# EAGLE board esp_all2 (EAGLE 7.7.0)
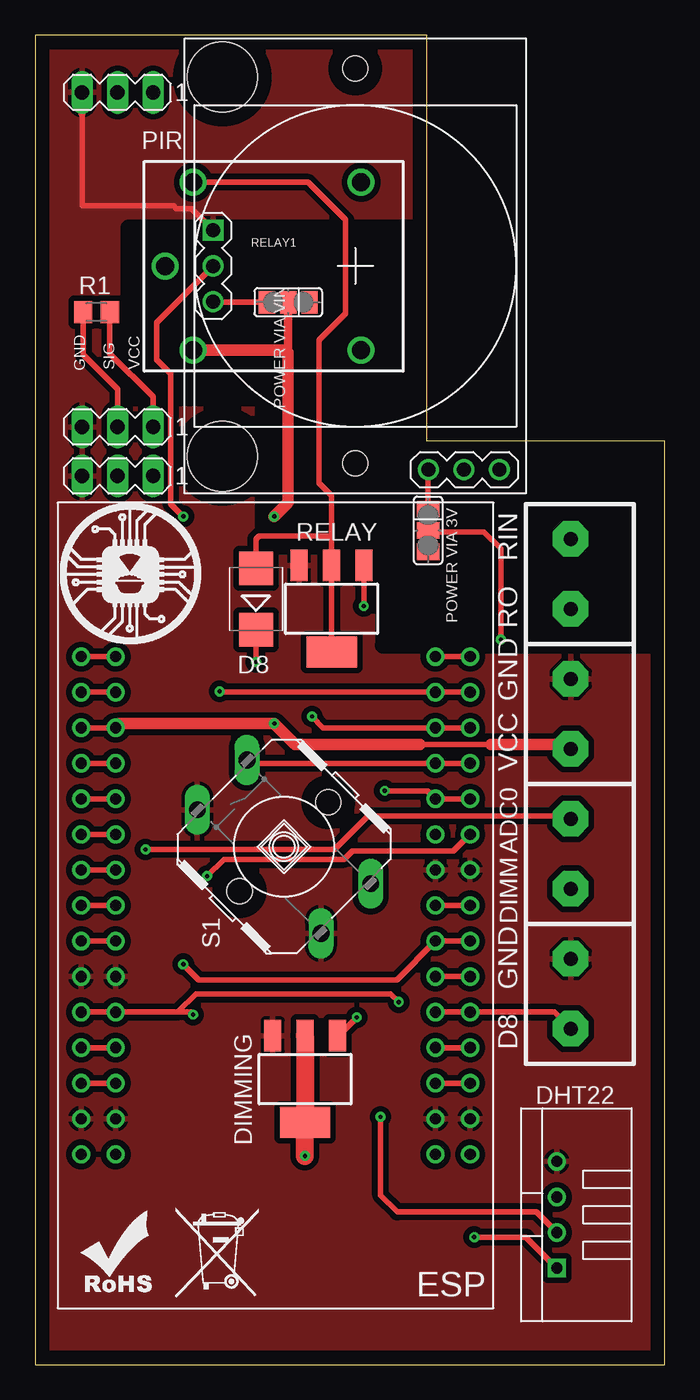
[diagram p0: board, top side]
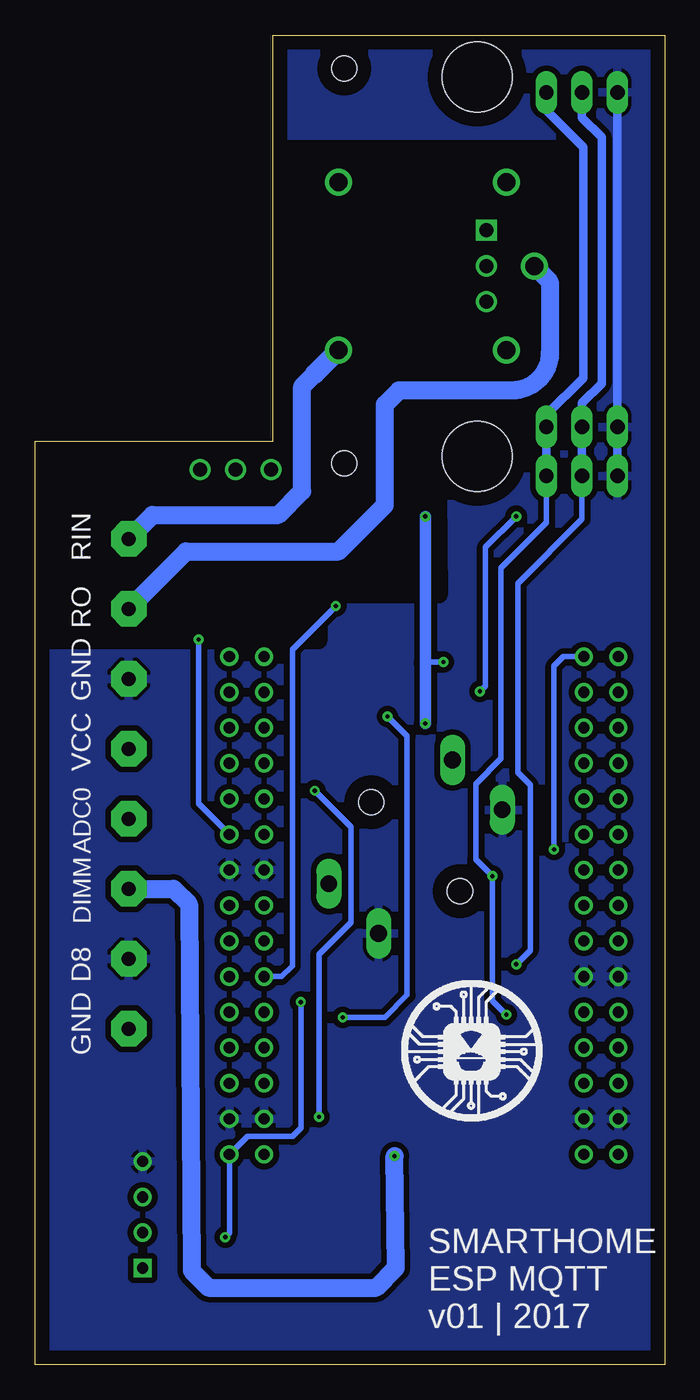
[diagram p1: board, bottom side, seen from below]

Size 45 x 95 mm. Coordinates in mm from the lower left corner, seen from the top.
Outline: 0,0 45,0 45,66 28,66 28,95 0,95 0,0
Copper layers (1*16): Top 0.035mm / dielectric 1.5mm / Bottom 0.035mm
Design rules "default": minimum track width 10mil, minimum drill 24mil, track to track 8mil, track to pad 8mil, pad to pad 8mil, via to via 8mil, smd to smd 8mil, copper to edge 40mil, drill to drill 8mil, minimum pad ring 10mil, minimum via ring 8mil, stop-mask expansion 4mil, vias tented up to drill 0mil, thermal gap 10mil
Holes 5 mm at 13.4,64.9 13.4,92
tRestrict: area 6.7,51.4 to 44.4,81.2
bRestrict: area 6.5,51.7 to 44.2,86.9

## Footprints (pad centres in the part's own frame; a part is rotated, then mirrored left to right if it is on the bottom)
SMB = smd 2.4 x 2.4: A 2.2,0; C -2.2,0
TEMP-HUM-SENSOR-DHT22 = drill 0.8 square: 1 -3.81,0 | drill 0.8: 2 -1.27,0; 3 1.27,0; 4 3.81,0
SOT223 = smd 1.219 x 2.235: 1 -2.311,-3.099; 2 0,-3.099; 3 2.311,-3.099 | smd 3.6 x 2.2: 4 0,3.099
ESP12E_DEVKIT = drill 0.8: 3V3@0 -11.43,-7.62; 3V3@1 11.43,5.08; 3V3@2 11.43,-17.78; 3V3@3 -13.9,-7.62; 3V3@4 13.9,5.08; 3V3@5 13.9,-17.78; AD0 -11.43,17.78; AD1 -13.9,17.78; CLK -11.43,-2.54; CLK1 -13.9,-2.54; CMD -11.43,2.54; CMD1 -13.9,2.54; D0 11.43,17.78; D1 11.43,15.24; D01 13.9,17.78; D2 11.43,12.7; D3 11.43,10.16; D4 11.43,7.62; D5 11.43,0; D6 11.43,-2.54; D7 11.43,-5.08; D8 11.43,-7.62; D11 13.9,15.24; D21 13.9,12.7; D31 13.9,10.16; D41 13.9,7.62; D51 13.9,0; D61 13.9,-2.54; D71 13.9,-5.08; D81 13.9,-7.62; EN -11.43,-10.16; EN1 -13.9,-10.16; GND@0 -11.43,-5.08; GND@1 -11.43,-15.24; GND@2 11.43,2.54; GND@3 11.43,-15.24; GND@4 -13.9,-15.24; GND@5 -13.9,-5.08; GND@6 13.9,2.54; GND@7 13.9,-15.24; RST -11.43,-12.7; RST1 -13.9,-12.7; RSV@0 -11.43,15.24; RSV@1 -11.43,12.7; RSV@01 -13.9,15.24; RSV@11 -13.9,12.7; RX 11.43,-10.16; RX1 13.9,-10.16; SD0 -11.43,0; SD1 -11.43,5.08; SD01 -13.9,0; SD2 -11.43,7.62; SD3 -11.43,10.16; SD12 -13.9,5.08; SD22 -13.9,7.62; SD32 -13.9,10.16; TX 11.43,-12.7; TX1 13.9,-12.7; VIN -11.43,-17.78; VIN1 -13.9,-17.78
MOTION-PIR-DYP-ME003 = drill 1 square: 1 -2.54,-10.16 | drill 1: 2 0,-10.16; 3 2.54,-10.16; 4 14.54,5.23; 5 14.54,7.77; 6 14.54,10.31 | hole 1.8: -14.1,0; 14.1,0
M0805 = smd 1.3 x 1.6: 1 -0.95,0; 2 0.95,0
SRD-05VDC-SL-C = drill 1.3: COIL0 -5.39,-6.12; COIL1 -5.39,5.88; SWCLOSED 6.61,-6.12; SWCOMMON -7.39,-0.12; SWOPEN 6.61,5.88
B3F/40XX = drill 1.194 long: 1 -6.198,-2.642; 2 2.642,6.198; 3 -2.642,-6.198; 4 6.198,2.642 | hole 1.803: -3.175,3.175; 3.175,-3.175
MA03-1 = drill 1.016 long: 1 -2.54,0; 2 0,0; 3 2.54,0
2_SCREW_PIN = drill 1 pad 2.54 octagon: P$1 -2.5,0.5; P$2 2.5,0.5
SMD_SJ_3WAY_CLOSED = smd 1.168 x 1.6: 1 -1.524,0; 2 0,0; 3 1.524,0

## Placement (x,y rotation side)
D8  ES2D  [SMB]  15.8,54.7 90 top
DHT22  TEMP-HUM-SENSOR-DHT22  [TEMP-HUM-SENSOR-DHT22]  37.3,10.7 90 top
DIMMING  DMN6068SE-13  [SOT223]  19.3,20.4 180 top
ESP  ESP12E_DEVKIT  [ESP12E_DEVKIT]  17.2,32.8 0 top
PIR  MOTION-PIR-DYP-ME003  [MOTION-PIR-DYP-ME003]  22.9,78.5 270 top
R1  4.7k  [M0805]  4.4,75.2 0 top
RELAY  DMN6068SE-13  [SOT223]  21.2,54 180 top
RELAY1  SRD-05VDC-SL-C  [SRD-05VDC-SL-C]  16.7,78.6 0 top
S1  [B3F/40XX]  17.8,37 270 top
SV1  [MA03-1]  5.9,90.9 180 top
SV2  [MA03-1]  5.9,67 180 top
SV3  [MA03-1]  5.9,63.5 180 top
U$1  LOGO_10X10_SILK  [LOGO2_10X10_SILK]  18.8,17.4 0 bottom
U$3  V1  [2_SCREW_PIN]  38.8,36.5 90 top
U$4  LOGO_NO_TRASHNO_TRASH  [LOGO_ROHS_NO_TRASH]  10,4.8 0 top
U$5  SMD_SJ_3WAY_CLOSED  [SMD_SJ_3WAY_CLOSED]  28.1,59.6 270 top
U$6  SMD_SJ_3WAY_CLOSED  [SMD_SJ_3WAY_CLOSED]  18.1,75.9 180 top
U$7  V1  [2_SCREW_PIN]  38.8,46.5 90 top
U$8  V1  [2_SCREW_PIN]  38.8,56.5 90 top
U$9  LOGO_NO_TRASHROHS  [LOGO_ROHS_SYM]  2.8,5.1 0 top
U$10  V1  [2_SCREW_PIN]  38.8,26.5 90 top
U$11  LOGO_10X10_SILK  [LOGO2_10X10_SILK]  1.8,51.5 0 top

## Library data of the parts
D8 = diode
DHT22 PIR = diy-modules
DIMMING RELAY = transistor-power
ESP = ESP12E_DEVKIT
R1 = rcl
RELAY1 U$1 U$3-U$11 = JKW_CHIP
S1 = switch-omron; OC_FARNELL: unknown; OC_NEWARK: unknown
SV1-SV3 = con-lstb; OC_FARNELL: unknown; OC_NEWARK: unknown

## Nets
EARTH_HUM_POW: ESP.D8 ESP.D81 U$10.P$1
GND: DHT22.4 DIMMING.3 ESP.GND@0 ESP.GND@1 ESP.GND@2 ESP.GND@3 ESP.GND@4 ESP.GND@5 ESP.GND@6 ESP.GND@7 PIR.1 RELAY.3 S1.3 S1.4 SV1.3 SV2.3 SV3.3 U$7.P$2 U$10.P$2
IN1: RELAY1.SWCOMMON U$8.P$1
N$1: ESP.AD0 ESP.AD1 U$3.P$2
N$2: ESP.RSV@0 ESP.RSV@01
N$3: ESP.3V3@1
N$4: ESP.SD3 ESP.SD32
N$5: ESP.SD2 ESP.SD22
N$6: ESP.SD1 ESP.SD12
N$7: ESP.CMD ESP.CMD1
N$8: ESP.SD0 ESP.SD01
N$9: ESP.CLK ESP.CLK1
N$10: ESP.D7 ESP.D71 RELAY.1
N$11: ESP.3V3@2
N$12: ESP.EN ESP.EN1
N$13: ESP.RST ESP.RST1
N$15: ESP.D6 ESP.D61 R1.1 SV1.2 SV2.2 SV3.2
N$17: DIMMING.2 DIMMING.4 U$3.P$1
N$18: ESP.TX ESP.TX1
N$19: ESP.RX ESP.RX1
N$23: ESP.D5 ESP.D51
N$24: PIR.4 U$5.1
N$25: DHT22.1 ESP.3V3@0 ESP.3V3@3 ESP.3V3@4 ESP.3V3@5 R1.2 SV1.1 SV2.1 SV3.1 U$5.2
N$26: DHT22.2 ESP.D4 ESP.D41
N$27: ESP.D3 ESP.D31 S1.1
N$28: DIMMING.1 ESP.D2 ESP.D21
N$29: ESP.D1 ESP.D11 PIR.2
N$30: ESP.D0 ESP.D01
N$31: PIR.3 U$6.3
NORMALLY_OPEN: RELAY1.SWCLOSED U$8.P$2
RELAY_LO3: D8.A RELAY1.COIL1 RELAY.2 RELAY.4
VCC: D8.C ESP.RSV@1 ESP.RSV@11 RELAY1.COIL0 U$6.2 U$7.P$1

## Tracks (layer width: path | path; a pad name or v marks a point on that pad's centre or on a via)
EARTH_HUM_POW
  Top 0.406: ESP.D8 ESP.D81 37.12,25.18 U$10.P$1
GND
  Top 0.406: PIR.1 11.18,82.6 10.1,82.6 9.9,82.8 3.36,82.8 3.36,89.3 | 3.36,89.3 3.4,89.34 3.4,90.8 | 3.36,89.3 3.3,89.36 3.3,89.4 3.4,89.5 3.4,90.9
  Bottom 0.61: SV1.3 SV2.3 SV3.3
  pour Top (isolate 0.406, rank 6): 8.4,94.7 27.5,94.7 27.5,65.7 44.7,65.7 44.7,0.4 8.3,0.4 0.1,0.1 0.1,94.4 8.5,94.4
  pour Bottom (isolate 0.406): 9.1,94.2 26.9,94.2 26.9,64.9 43.7,64.9 43.7,0.5 1.3,0.5 1.3,93.9 8.7,93.9
IN1
  Bottom 1.27: RELAY1.SWCOMMON 8.2,77.37 8.2,72.3 arc90 10.9,69.6 19,69.6 20,68.6 20,61.4 23.3,58.1 34.2,58.1 U$8.P$1
N$1  (via drill 0.3)
  Top 0.406: ESP.AD1 ESP.AD0 | U$3.P$2 38.1,39.2 23.8,39.2 21.4,36.8 v7.9,36.8
  Bottom 0.406: v7.9,36.8 7.9,49.9 7.22,50.58 ESP.AD0
N$2
  Top 0.406: ESP.RSV@01 ESP.RSV@0
N$4
  Top 0.406: ESP.SD32 ESP.SD3
N$5
  Top 0.406: ESP.SD22 ESP.SD2
N$6
  Top 0.406: ESP.SD12 ESP.SD1
N$7
  Top 0.406: ESP.CMD1 ESP.CMD
N$8
  Top 0.406: ESP.SD0 ESP.SD01
N$9
  Top 0.406: ESP.CLK1 ESP.CLK
N$10  (via drill 0.3)
  Top 0.406: ESP.D7 ESP.D71 | v23.5,54.2 23.5,57.09 RELAY.1
  Bottom 0.406: ESP.D7 27.38,27.72 26.6,28.5 26.6,51.1 v23.5,54.2
N$12
  Top 0.406: ESP.EN1 ESP.EN
N$13
  Top 0.406: ESP.RST1 ESP.RST
N$15  (via drill 0.3)
  Top 0.406: R1.1 3.45,72.15 5.9,69.7 SV2.2 5.9,66.5 | v10.6,28.6 11.7,27.5 25.87,27.5 ESP.D6 ESP.D61
  Bottom 0.406: SV3.2 5.9,60.4 10.5,55.8 10.5,42.3 9.6,41.4 9.6,29.6 v10.6,28.6
  Bottom 0.61: SV3.2 SV2.2 5.9,68.7 4.5,70.1 4.5,87.7 5.9,89.1 SV1.2
N$17  (via drill 0.3)
  Top 1.27: DIMMING.2 DIMMING.4 v19.3,14.9
  Bottom 1.27: U$3.P$1 35.1,34 34,32.9 33.8,6.7 32.6,5.5 20.6,5.5 19.2,6.9 v19.3,14.9
N$18
  Top 0.406: ESP.TX ESP.TX1
N$19
  Top 0.406: ESP.RX ESP.RX1
N$23
  Top 0.406: ESP.D51 ESP.D5
N$24
  Top 0.406: U$5.1 28.1,63.93 PIR.4
N$25  (via drill 0.3)
  Top 0.406: R1.2 5.35,72.25 8.44,69.16 SV2.1 | ESP.3V3@3 ESP.3V3@0 10.18,25.18 | 10.18,25.18 11.5,26.5 25.4,26.5 v26,25.9 | DHT22.1 35.09,9.1 v31.4,9.1 | ESP.3V3@4 29.92,36.7 22.7,36.7 22.1,36.1 13.5,36.1 v12.3,34.9 | v11.3,25 11.12,25.18 10.18,25.18 | U$5.2 28.2,59.5 32.1,59.5 33.3,58.3 v33.3,51.8
  Bottom 0.406: v31.4,9.1 31.1,9.4 ESP.3V3@5 29.82,16.3 26.6,16.3 26,16.9 v26,25.9 | v11.3,25 12.3,26 v12.3,34.9 13.5,36.1 13.5,41.5 11.7,43.3 11.7,56.9 8.44,60.16 SV3.1 | v33.3,51.8 33.3,40.08 ESP.3V3@4
  Bottom 0.61: SV3.1 SV2.1 8.44,67.86 5.8,70.5 5.8,87 8.44,89.64 SV1.1
N$26  (via drill 0.3)
  Top 0.406: ESP.D41 ESP.D4 28.05,41 v25,41 | DHT22.2 35.83,10.9 25.9,10.9 24.7,12.1 v24.7,17.7
  Bottom 0.406: v24.7,17.7 24.7,29.3 22.4,31.6 22.4,38.4 v25,41
N$27
  Top 0.406: ESP.D31 ESP.D3 15.4,42.96 S1.1
N$28  (via drill 0.3)
  Top 0.406: ESP.D21 ESP.D2 20.6,45.5 v19.8,46.3 | DIMMING.1 21.7,23.5 v23,24.8
  Bottom 0.406: v23,24.8 20,24.8 18.4,26.4 18.4,44.9 v19.8,46.3
N$29  (via drill 0.3)
  Top 0.406: ESP.D11 ESP.D1 13.26,48.04 v13.2,48.1 | PIR.2 8.7,74.46 8.7,71.8 9.7,70.8 9.7,61.5 v10.6,60.6
  Bottom 0.406: v13.2,48.1 12.8,48.5 12.8,58.4 v10.6,60.6
N$30
  Top 0.406: ESP.D01 ESP.D0
N$31
  Top 0.406: PIR.3 12.8,75.9 U$6.3
NORMALLY_OPEN
  Bottom 1.27: U$8.P$2 36.6,60.7 27.6,60.7 25.9,62.4 25.9,69.89 25,70.79
  Bottom 1.422: 25,70.79 RELAY1.SWCLOSED
RELAY_LO3
  Top 0.406: 21.2,59.1 RELAY.2 RELAY.4 | RELAY1.COIL1 19.52,84.48 22.2,81.8 22.2,75.1 20.3,73.2 20.3,63 21.2,62.1 21.2,59.1 | D8.A 15.8,59 16,59.2 21.1,59.2 21.2,59.1
VCC  (via drill 0.3)
  Top 0.406: 6.07,45.8 ESP.RSV@1 ESP.RSV@11 | U$7.P$1 38,44.3 | D8.C v15.8,50.2 | 17.92,72.48 18.1,72.3 | 27.5,44.3 32.6,44.3
  Top 0.61: U$6.2 18.1,72.3
  Top 0.813: 18.1,72.3 18.1,61.6 v17.1,60.6 | RELAY1.COIL0 17.92,72.48 | 6.07,45.8 v17.1,45.8 18.6,44.3 27.5,44.3 | 32.6,44.3 38,44.3 arc-90 U$7.P$1
  Bottom 0.406: v15.8,50.2 17,50.2 17.1,50.1
  Bottom 0.813: v17.1,60.6 17.1,50.1 v17.1,45.8

## Text on the board
tNames: GND | SIG | VCC | POWER VIA VIN | POWER VIA 3V | RIN | RO | GND | VCC | ADC0 | DIMM | GND | D8
bNames: RIN | RO | GND | VCC | ADC0 | DIMM | D8 | GND | SMARTHOME / ESP MQTT / v01 | 2017